# Altium PCB adapter-50-100mil-x12.PcbDoc
Units mil, origin at the board's own origin, x right, y up, seen from the top; angles counter-clockwise.
Board outline 285 x 610 mil, 2 copper layers (Top Layer, Bottom Layer); 2 components, 12 nets, 24 pads, 0 vias.
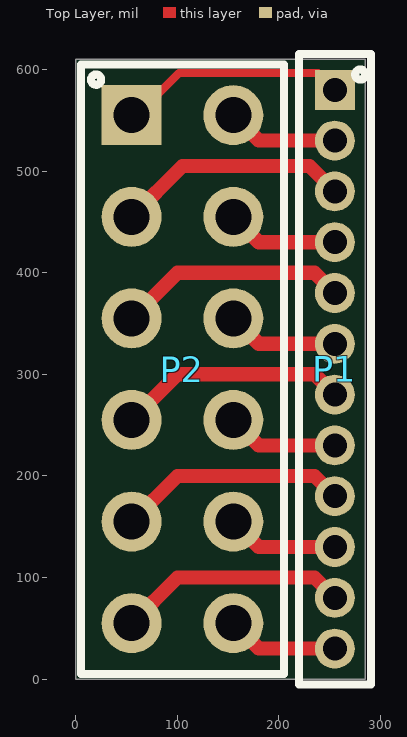
[diagram p0: Top Layer view]
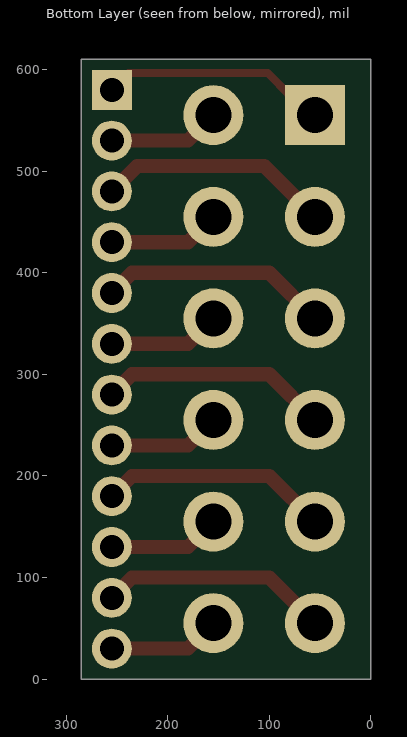
[diagram p1: Bottom Layer view, seen from below]

## Layer stack, top to bottom
Top Solder: solder mask 0.4, Solder Resist, Dk 3.5
Top Layer: signal copper 1.4
Dielectric 1: dielectric 12.6, FR-4, Dk 4.8
Bottom Layer: signal copper 1.4
Bottom Solder: solder mask 0.4, Solder Resist, Dk 3.5

## Board outline
0,0 285,0 285,610 0,610

## Design rules (kind name [scope] priority, off if disabled: settings)
Clearance [All] p1: gap=10 ignorepadtopadclearanceinfootprint=FALSE except(0: Arc-Text Arc-Hole Track-Text Track-Hole SMDPad-Hole THPad-Hole Via-Hole Fill-Hole Poly-Hole Region-Hole Text-Hole; 8: Arc-Arc Arc-Track Arc-SMDPad Arc-THPad Arc-Via Arc-Fill Arc-Poly Arc-Region Track-Track Track-SMDPad Track-THPad Track-Via Track-Fill Track-Poly Track-Region)
ComponentClearance [All] p1: gap=5 collisioncheckmode=3 verticalgap=10 showdistances=FALSE
PolygonConnect [All] p1: connectstyle=Relief reliefconductorwidth=10 reliefentries=4 polygonreliefangle="90 Angle" airgapwidth=10
RoutingVias [All] p1: holewidth=28 width=50 viastyle="Through Hole" minholewidth=28 minwidth=50 maxholewidth=28 maxwidth=50
SolderMaskExpansion [All] p1: expansion=4
Width [All] p1: maxlimit=20 minlimit=8 preferedwidth=10
29 further rules are at their usual default settings.

## Classes and differential pairs
component class adapter-50-100mil-x12: P1

## Components (designator, comment, footprint, x,y, rotation, side; value= is the part's Value field where it differs from the comment)
P1 "MHDR1X12" MHDR1X12 255,580 r270 top
P2 "Header 6X2" HDR2X6 55,555 r270 top

## Footprints (in the part's own frame and the unit in brackets; to place one, negate y for a bottom-side part, rotate by r counter-clockwise, add the part's x,y. Pads: shape width x height; smd on the part's side, far side on the other; paste and mask are expansions set on the pad)
HDR2X6 [mm] "Connector; Header; 6x2 Position"
  rect 1.5x1.5 hole 0.9: 1(0,0)
  round 1.5 hole 0.9: 2(0,2.54) 3(2.54,0) 4(2.54,2.54) 5(5.08,0) 6(5.08,2.54) 7(7.62,0) 8(7.62,2.54) 9(10.16,0) 10(10.16,2.54) 11(12.7,0) 12(12.7,2.54)
  silkscreen extent -1.27,-1.27 13.97,3.81
MHDR1X12 [mm] "Connector; Header; 12 Position"
  rect 1x1 hole 0.6: 1(0,0)
  round 1 hole 0.6: 2(1.27,0) 3(2.54,0) 4(3.81,0) 5(5.08,0) 6(6.35,0) 7(7.62,0) 8(8.89,0) 9(10.16,0) 10(11.43,0) 11(12.7,0) 12(13.97,0)
  silkscreen extent -0.9,-0.9 14.87,0.9

## Part data
P1: "Header, 12-Pin", LatestRevisionDate=17-Jul-2002, LatestRevisionNote="Re-released for DXP Platform.", Publisher="Altium Limited"
P2: "Header, 6-Pin, Dual row", LatestRevisionDate=17-Jul-2002, LatestRevisionNote="Re-released for DXP Platform.", Publisher="Altium Limited"

## Nets (pads, with @x,y where several pads share a name; then routed paths per layer and width w, separated by ;. In a path a pad name is that pad's centre, name@x,y a point inside that pad or via, vN(x,y) a via of type N, cw(c..) or ccw(c..) an arc to the next point about the centre after c; other vN are vias at no path point)
NetP1_1: P1.1 P2.1 | length 224
  Top Layer w8: P2.1@80,575 101.53,596.53 238.47,596.53 P1.1
  Top Layer w10: P2.1 75,575 P2.1@80,575
NetP1_2: P1.2 P2.2 | length 110.4
  Top Layer w14: P2.2 180,530 P1.2
NetP1_3: P1.3 P2.3 | length 231.1
  Top Layer w14: P2.3 105,505 230,505 P1.3
NetP1_4: P1.4 P2.4 | length 110.4
  Top Layer w14: P2.4 180,430 P1.4
NetP1_5: P1.5 P2.5 | length 236.9
  Top Layer w14: P2.5@65,355 P2.5 100,400 235,400 P1.5
NetP1_6: P1.6 P2.6 | length 110.4
  Top Layer w14: P2.6 180,330 P1.6
NetP1_7: P1.7 P2.7 | length 226.9
  Top Layer w14: P2.7 100,300 235,300 P1.7
NetP1_8: P1.8 P2.8 | length 110.4
  Top Layer w14: P2.8 180,230 P1.8
NetP1_9: P1.9 P2.9 | length 226.9
  Top Layer w14: P2.9 100,200 235,200 P1.9
NetP1_10: P1.10 P2.10 | length 110.4
  Top Layer w14: P2.10 180,130 P1.10
NetP1_11: P1.11 P2.11 | length 226.9
  Top Layer w14: P2.11 100,100 235,100 P1.11
NetP1_12: P1.12 P2.12 | length 110.4
  Top Layer w14: P2.12 180,30 P1.12

## Silkscreen, mask and mechanical layers (free items; w line width, h text height)
Top Overlay:
  circle w8: c280,595 r5
  circle w8: c20,590 r5
Mechanical 1:
  the board outline again, w1